# Altium PCB AMU_v2_w4.PcbDoc
Units mm, origin at the board's own origin, x right, y up, seen from the top; angles counter-clockwise.
Board outline 33 x 113 mm, 2 copper layers (Top Layer, Bottom Layer), stack 1.571 mm thick; 73 components, 85 nets, 229 pads, 101 vias.
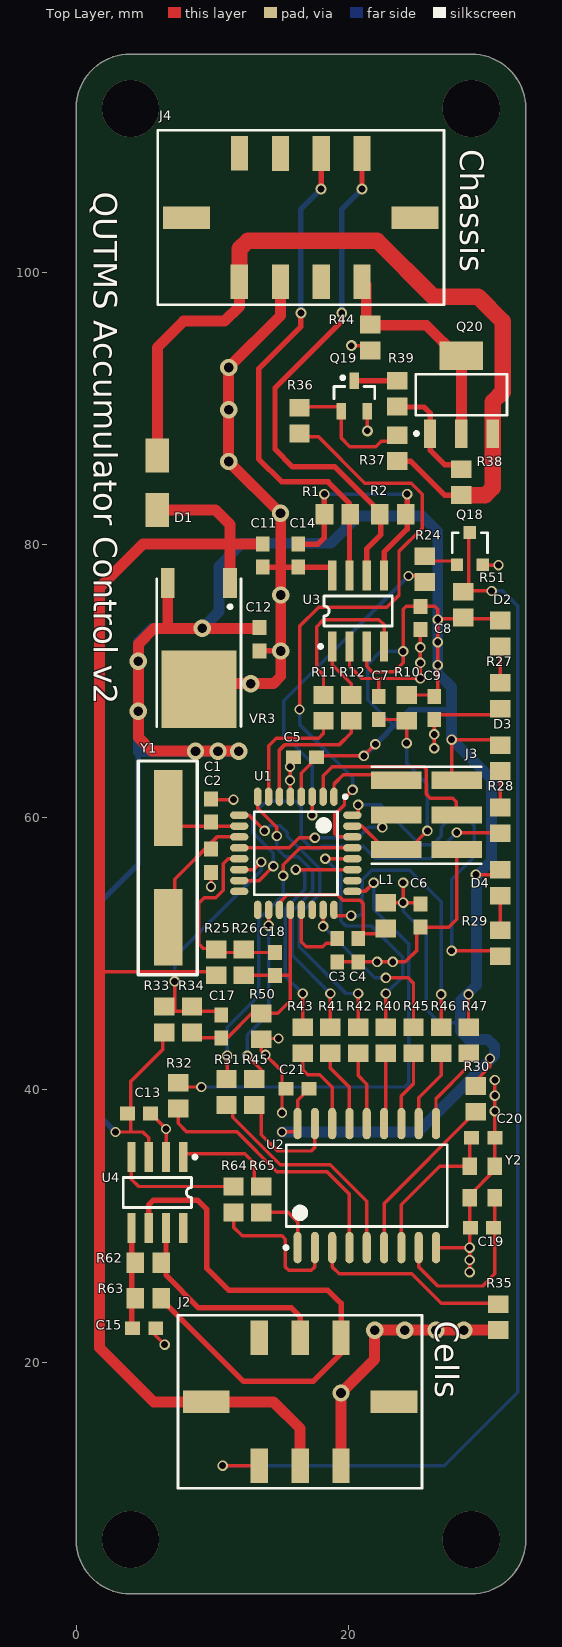
[diagram p0: Top Layer view]
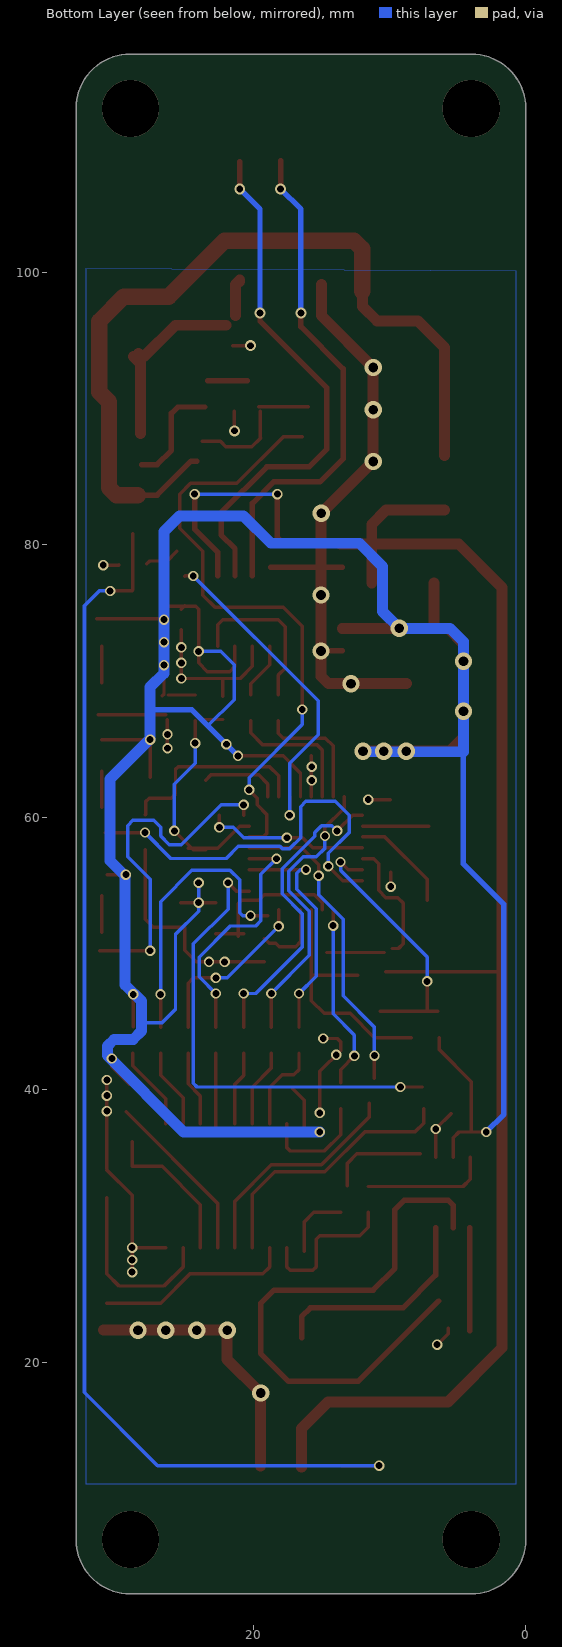
[diagram p1: Bottom Layer view, seen from below]

## Layer stack, top to bottom
Top Solder: solder mask 0.0102, Solder Resist, Dk 3.5
Top Layer: signal copper 0.0356
Dielectric1: core 1.5, FR-4, Dk 4.8
Bottom Layer: signal copper 0.0356
Bottom Solder: solder mask 0.0102, Solder Resist, Dk 3.5

## Board outline
0,7 0,112 cw(c4,112) 4,116 29,116 cw(c29,112) 33,112 33,7 cw(c29,7) 29,3 4,3 cw(c4,7)

## Design rules (kind name [scope] priority, off if disabled: settings)
Clearance [All] p1: gap=0.18
FabricationTestPointUsage TestPointUsage [All] p1: valid=0 allowmultiple=FALSE
FabricationTestpoint Testpoint [All] p1: side=3 testpointundercomponent=TRUE minsize=1.016 maxsize=2.54 preferedsize=1.524 minholesize=0 maxholesize=1.016 preferedholesize=0.813 testpointgrid=0.025 allowsidetop=TRUE allowsidebottom=TRUE usegrid=TRUE gridtolerance=0
HoleSize [All] p1: absolutevalues=TRUE maxlimit=10 minlimit=0.025 maxpercent=80.000 minpercent=20.000
PolygonConnect [All] p1: connectstyle=Relief reliefconductorwidth=0.254 reliefentries=4 polygonreliefangle="90 Angle" airgapwidth=0.254
RoutingVias [All] p1: holewidth=0.711 width=1.27 viastyle="Through Hole" minholewidth=0.2 minwidth=0.5 maxholewidth=10 maxwidth=10
SolderMaskExpansion SolderMaskExpansion_1 [(IsVia)] p1: expansion=-1
SolderMaskExpansion [All] p2: expansion=0.106
Width [All] p1: maxlimit=10 minlimit=0.2 preferedwidth=0.254 minimp=50.000000 maximp=50.000000 favimp=50.000000
27 further rules are at their usual default settings.

## Components (designator, comment, footprint, x,y, rotation, side; value= is the part's Value field where it differs from the comment)
C1 "Comment" J1-0603 9.906,60.485 r90 top
C2 "Comment" J1-0603 9.906,56.802 r90 top
C3 "Comment" J1-0603 19.177,50.237 r90 top
C4 "Comment" J1-0603 20.701,50.237 r90 top
C5 "Comment" J1-0603 16.8,64.4 r180 top
C6 "Comment" J1-0603 25.273,52.777 r90 top
C7 "Comment" J1-0603 22.225,68.017 r90 top
C8 "Comment" J1-0603 25.273,74.621 r90 top
C9 "Comment" J1-0603 26.289,68.017 r90 top
C11 "Comment" J1-0603 13.7,79.2 r270 top
C12 "Comment" J1-0603 13.462,73.058 r270 top
C13 "Comment" J1-0603 4.619,38.258 r180 top
C14 "Comment" J1-0603 16.3,79.2 r270 top
C15 "Comment" J1-0603 5,22.5 r180 top
C17 "Comment" J1-0603 10.668,44.649 r90 top
C18 "Comment" J1-0603 14.605,49.221 r90 top
C19 "Comment" J1-0603 29.784,29.876 r180 top
C20 "Comment" J1-0603 29.884,36.476 r180 top
C21 "Comment" J1-0603 16.256,40.077 r180 top
D1 "Comment" 2012[0805]#1 5.969,85.797 r270 top
D2 "Comment" 2012[0805]#2 31.115,73.478 r270 top
D3 "Comment" 2012[0805]#2 31.115,64.334 r270 top
D4 "Comment" 2012[0805]#2 31.115,55.19 r270 top
J2 "43045-0618" SO8#1 14.6,15.2 r0 top locked
J3 "15-91-3060" SOT23-6 25.273,60.397 r270 top
J4 "Header 4X2" MOLEX_8 16.5,104 r0 top
L1 "Comment" 2012[0805]#2 22.733,52.777 r270 top
Q18 "Comment" SOT23A 28.9,79.7 r0 top
Q19 "2N7002" SOT23_SAE 20.425,90.9 r0 top (schematic designator Q3)
Q20 "MOSFET_P_SAE" SOT-223 28.275,91 r0 top (schematic designator Q4)
R1 "Comment" 2012[0805]#2 19.177,82.241 r180 top
R2 "Comment" 2012[0805]#2 23.241,82.241 r180 top
R10 "Comment" 2012[0805]#2 24.257,68.017 r270 top
R11 "Comment" 2012[0805]#2 18.161,68.017 r270 top
R12 "Comment" 2012[0805]#2 20.193,68.017 r270 top
R24 "Comment" 2012[0805]#2 25.6,78.2 r270 top
R25 "Comment" 2012[0805]#2 10.287,49.348 r270 top
R26 "Comment" 2012[0805]#2 12.319,49.348 r270 top
R27 "Comment" 2012[0805]#2 31.115,68.906 r270 top
R28 "Comment" 2012[0805]#2 31.115,59.762 r270 top
R29 "Comment" 2012[0805]#2 31.115,50.745 r270 top
R30 "Comment" 2012[0805]#2 29.328,39.328 r270 top
R31 "Comment" 2012[0805]#2 11.04,39.836 r270 top
R32 "Comment" 2012[0805]#2 7.493,39.569 r270 top
R33 "Comment" 2012[0805]#2 6.477,45.157 r270 top
R34 "Comment" 2012[0805]#2 8.509,45.157 r270 top
R35 "Comment" 2012[0805]#2 30.988,23.313 r270 top
R36 "Comment" 2012[0805]#2 16.4,89.1 r90 top
R37 "Comment" 2012[0805]#2 23.573,87.085 r270 top
R38 "Comment" 2012[0805]#2 28.273,84.585 r270 top
R39 "Comment" 2012[0805]#2 23.573,91.085 r270 top
R40 "Comment" 2012[0805]#2 22.733,43.633 r270 top
R41 "Comment" 2012[0805]#2 18.669,43.633 r270 top
R42 "Comment" 2012[0805]#2 20.701,43.633 r270 top
R43 "Comment" 2012[0805]#2 16.637,43.633 r270 top
R44 "Comment" 2012[0805]#2 21.6,95.2 r270 top
R45 "Comment" 2012[0805]#2 13.072,39.836 r270 top
R45 "Comment" 2012[0805]#2 24.765,43.633 r270 top
R46 "Comment" 2012[0805]#2 26.797,43.633 r270 top
R47 "Comment" 2012[0805]#2 28.829,43.633 r270 top
R50 "Comment" 2012[0805]#2 13.589,44.649 r270 top
R51 "Comment" 2012[0805]#2 28.4,75.6 r270 top
R62 "Comment" 2012[0805]#2 5.3,27.3 r0 top
R63 "Comment" 2012[0805]#2 5.3,24.7 r180 top
R64 "Comment" 2012[0805]#2 11.557,31.949 r270 top
R65 "Comment" 2012[0805]#2 13.589,31.949 r270 top
U1 "INJ2" 32A_L 16.129,57.349 r270 top locked
U2 "MCP2515" SOL-18_N 21.336,32.965 r90 top locked
U3 "CAN xcvr" SO8#2 20.701,75.129 r0 top
U4 "CAN xcvr" SO8#2 5.969,32.457 r180 top
VR3 "" 369A-13 9.017,73.097 r180 top
Y1 "Comment" 2012[0805]#3 6.746,59.724 r270 top
Y2 "Comment" SOT223 32.134,30.476 r180 top

## Footprints (in the part's own frame and the unit in brackets; to place one, negate y for a bottom-side part, rotate by r counter-clockwise, add the part's x,y. Pads: shape width x height; smd on the part's side, far side on the other; paste and mask are expansions set on the pad)
32A_L [mm] "Thin QFP, 32-Leads, Body 7x7mm, Pitch 0.8mm, IPC High Density"
  oval 1.35x0.55 smd: 1(-4.15,2.8) 2(-4.15,2) 3(-4.15,1.2) 4(-4.15,0.4) 5(-4.15,-0.4) 6(-4.15,-1.2) 7(-4.15,-2) 8(-4.15,-2.8) 17(4.15,-2.8) 18(4.15,-2) 19(4.15,-1.2) 20(4.15,-0.4) 21(4.15,0.4) 22(4.15,1.2) 23(4.15,2) 24(4.15,2.8)
  oval 0.55x1.35 smd: 9(-2.8,-4.15) 10(-2,-4.15) 11(-1.2,-4.15) 12(-0.4,-4.15) 13(0.4,-4.15) 14(1.2,-4.15) 15(2,-4.15) 16(2.8,-4.15) 25(2.8,4.15) 26(2,4.15) 27(1.2,4.15) 28(0.4,4.15) 29(-0.4,4.15) 30(-1.2,4.15) 31(-2,4.15) 32(-2.8,4.15)
  silkscreen extent -4.27,-3.05 3.05,3.75, body extent -3.5,-3.5 3.5,3.5, height 1.2
369A-13 [mm] "TO, Flat Index; 3 In-Line, Axial Leads; Body Dia. 4.6mm; Lead Dia. 0.5 mm (max)"
  rect 1x2.2 smd: 1(-2.285,-4.1) 3(2.285,-4.1)
  rect 5.5x5.7 smd: 4(0,3.7)
  silkscreen extent -3.09,-4.4 3.08,6.45
2012[0805]#1 [mm] "Chip Resistor; Body 2.0 x 1.3 mm (LxW typ)"
  rect 2.5x1.7 smd: 1(-0.74,-0.004) 2(3.26,-0.004)
2012[0805]#2 [mm] "Chip Resistor; Body 2.0 x 1.3 mm (LxW typ)"
  rect 1.3x1.5 smd: 1(-0.95,0) 2(0.95,0)
2012[0805]#3 [mm] "Crystal, Thru-Hole; 2 Leads; Body 3.1 x 8.2 mm (Dia.xH)"
  rect 5.6x2.1 smd: 1(-0.95,0.025) 2(7.8,0.025)
J1-0603 [mm] "Chip Capacitor; Body 1.0 x 0.5 mm (LxW typ)"
  rect 1.1x1 smd: 1(-0.85,0) 2(0.85,0)
MOLEX_8 [mm] "SOP, 8-Leads, Body 5.3x5.3mm, Pitch 1.27mm, IPC High Density"
  rect 1.27x2.54 smd: 1(4.485,-4.7) 2(1.485,-4.7) 3(-1.5,-4.7) 4(-4.515,-4.7) 5(4.485,4.7) 6(1.485,4.7) 7(-1.5,4.7) 8(-4.502,4.708)
  rect 3.43x1.65 smd: ""(-8.4,0) ""(8.37,0)
  silkscreen extent -10.5,-6.4 10.5,6.4, body extent -9.82,-5.61 9.82,5.59, height 9.95
SO8#1 [mm] "SOP, 8-Leads, Body 5.3x5.3mm, Pitch 1.27mm, IPC High Density"
  rect 1.27x2.54 smd: 1(4.844,-2.804) 2(1.844,-2.804) 3(-1.156,-2.804) 4(4.844,6.596) 5(1.844,6.596) 6(-1.156,6.596)
  rect 3.43x1.65 smd: ""(-5.041,1.896) ""(8.729,1.896)
  silkscreen extent -7.11,-4.44 10.79,8.25
SO8#2 [mm] "SOP, 8-Leads, Body 5.3x5.3mm, Pitch 1.27mm, IPC High Density"
  rect 0.6x2.2 smd: 1(-1.905,-2.6) 2(-0.635,-2.6) 3(0.635,-2.6) 4(1.905,-2.6) 5(1.905,2.6) 6(0.635,2.6) 7(-0.635,2.6) 8(-1.905,2.6)
  silkscreen extent -2.88,-2.72 2.5,1.1
SOL-18_N [mm] "SOIC, 18-Leads, Body 11.6x7.5mm, Pitch 1.27mm, IPC Medium Density"
  oval 2.3x0.6 smd: 1(-4.55,5.08) 2(-4.55,3.81) 3(-4.55,2.54) 4(-4.55,1.27) 5(-4.55,0) 6(-4.55,-1.27) 7(-4.55,-2.54) 8(-4.55,-3.81) 9(-4.55,-5.08) 10(4.55,-5.08) 11(4.55,-3.81) 12(4.55,-2.54) 13(4.55,-1.27) 14(4.55,0) 15(4.55,1.27) 16(4.55,2.54) 17(4.55,3.81) 18(4.55,5.08)
  silkscreen extent -4.67,-5.9 3,6.05, body extent -3.8,-5.95 3.8,5.95, height 2.65
SOT23-6 [mm] "SOT-23/SC-74A; 5 Leads; Body 3.1 x 3 mm, inc. leads (LxW max)"
  rect 1.27x3.68 smd: 1(-2.308,-1.78) 2(-2.308,2.66) 3(0.232,-1.78) 4(0.232,2.66) 5(2.772,-1.78) 6(2.772,2.66)
  silkscreen extent -3.3,-3.56 3.81,4.45
SOT23_SAE [mm]
  rect 0.7x1.2 smd: 1(-0.95,-1.125) 2(0.95,-1.125) 3(0,1.125)
  silkscreen extent -1.5,-0.2 1.5,1.47, body extent -1.5,-1.13 1.5,1.13, height 1.21
SOT23A [mm] "SOT-23; 3 Leads; Body 3.0 x 2.5 mm, inc. leads (LxW max)"
  rect 0.9x0.95 smd: 1(-0.95,-1.175) 2(0.95,-1.175) 3(0,1.175)
  silkscreen extent -1.3,-0.3 1.3,1.18
SOT223 [mm] "SOT-223/SC-73; 4 Leads; Body 6.7 x 7.3 mm, inc. leads (LxW max)"
  rect 1.05x1.3 smd: 1(3.25,-3.9) 2(3.25,-1.6) 3(1.4,-1.6) 4(1.4,-3.9)
SOT-223 [mm]
  rect 0.9x2.1 smd: 1(-2.3,-2.85) 2(0,-2.85) 3(2.3,-2.85)
  rect 3.2x2.1 smd: 2(0,2.85)
  silkscreen extent -3.42,-2.97 3.35,1.5, body extent -3.25,-3.56 3.25,3.51, height 1.6

## Part data
J2 U3 U4: library part "SW DIP-4"
J4: "Header, 4-Pin, Dual row"
Q19: library part 2N7002_SAE
U1: library part ATtiny28L-4AI
Y1: library part "Res Semi"

## Via types
v1: diameter 0.762, hole 0.508, Top Layer to Bottom Layer, 73 vias
v2: diameter 1.27, hole 0.711, Top Layer to Bottom Layer, 18 vias
v3: diameter 0.8, hole 0.5, Top Layer to Bottom Layer, 6 vias
v4: diameter 4.2, hole 4.2, Top Layer to Bottom Layer, 4 vias

## Nets (pads, with @x,y where several pads share a name; then routed paths per layer and width w, separated by ;. In a path a pad name is that pad's centre, name@x,y a point inside that pad or via, vN(x,y) a via of type N, cw(c..) or ccw(c..) an arc to the next point about the centre after c; other vN are vias at no path point)
5V: C5.1 C6.2 C8.2 C9.2 C12.1 C13.2 C21.1 D2.1 D3.1 D4.1 J3.2 L1.1 R10.1 R30.1 R33.2 R47.1 R51.2 U1.4 U2.18 U3.3 U4.3 VR3.3 | length 256.5
  Top Layer w0.254: v1(2.9,36.9) 4,36.9 ; U4.3 5.334,36.466 4.9,36.9 4,36.9 ; R33.2@6.35,43.826 6.35,42.95 4,40.6 4,38.2 4,36.9 ; v1(15.113,36.902) 16.002,36.902 16.256,37.156 16.256,39.227 C21.1 ; U1.4 16.529,63.229 17.8,64.5 21.121,64.5 v1(21.971,65.35) ; U3.3 21.336,71.065 21.717,70.684 23.368,70.684 24.003,71.319 24.003,75.256 24.218,75.471 26.328,75.471 26.543,75.256 26.543,69.033 C9.2@26.67,68.906 ; L1.1 C6.2@25.334,53.727 ; v1(24.003,53.727) v1(24.003,55.19) ; R10.1 C9.2@26.223,68.967 ; C8.2@25.019,75.51 C8.2@25.273,75.256 ; v1@26.543,74.555 D2.1@31.496,74.555 ; J3.2@27.559,62.937 v1(27.559,65.692) D3.1@31.115,65.692 ; R47.1@28.8,44.612 v1(28.8,47) ; R30.1@29.1,40.4 30.373,41.673 v1(30.373,42.29) ; v1(29.337,55.786) D4.1@30.695,55.786
  Top Layer w0.8: 6.732,73.859 VR3.3 ; v2(11.938,64.842) 5.588,64.842 4.572,65.858 4.572,72.716 5.715,73.859 C12.1@13.462,73.859
  Bottom Layer w0.254: 23.321,66.7 21.4,68.621 21.4,71.2 22.369,72.169 v1(24.003,72.169) ; v1(24.003,55.19) 24.003,53.097 25.7,51.4 25.7,45.9 26.7,44.9 28.2,44.9
  Bottom Layer w0.4: v1(2.9,36.9) 1.6,38.2 1.6,53.6 4.572,56.572 4.572,64.8 ; v1(21.118,64.497) 24.521,67.9 27.559,67.9
  Bottom Layer w0.8: v2@11.98,64.8 4.572,64.8 4.572,72.872 5.559,73.859 9.259,73.859 10.5,75.1 10.5,78.4 12.2,80.1 18.7,80.1 20.7,82.1 25.4,82.1 26.543,80.957 26.543,70.557 27.559,69.541 27.559,65.741 30.5,62.8 30.5,56.8 29.4,55.7 29.4,47.7 28.2,46.5 28.2,44.3 28.8,43.7 30.2,43.7 30.7,43.2 30.7,42.5 25.102,36.902 v1(15.113,36.902)
  other v1: 26.543,71.153 26.543,72.843 26.543,74.494
  other v2: 8.763,64.842 10.414,64.842 4.572,67.763 4.572,71.446 9.271,73.859
5V_split: C17.2 R33.1 R34.1 U1.14 | length 19.7
  Top Layer w0.254: R33.1@6.438,45.753 C17.2@10.668,45.753 ; 7.239,45.753 v1(7.239,47.951) ; U1.14 13.024,56.149 v1(13.589,56.714)
  Bottom Layer w0.254: v1(7.239,47.951) 7.239,49.739 13.589,56.089 v1(13.589,56.714)
AGND: C17.1 C18.1 R26.2 R34.2 R50.1 U1.20 | length 18.5
  Top Layer w0.254: R34.2@8.382,43.826 11.115,43.826 12.888,45.599 14.793,45.599 15.729,46.535 U1.20 ; R26.2 15.729,48.398
Alarm_Gate: Q20.1 R38.1 R39.2 | length 8
  Top Layer w0.4: R39.2@23.55,90.1 25.525,90.1 26,89.625 26,86.925 27.05,85.875 R38.1@28.175,85.875
Alarm_N_Drain: Q19.3 R39.1 | length 2.9
  Top Layer w0.4: Q19.3 R39.1@23.325,92.025
Alarm_N_Gate: Q19.1 R36.2 R37.1 | length 10.3
  Top Layer w0.254: R36.2@15.95,90.125 Q19.1@19.6,90.125 ; 19.45,87.825 20.1,87.175 22,87.175 22.4,87.575 R37.1@23.725,87.575 ; 19.475,87.85 Q19.1
AMS_alarm: J4.1 Q20.2 R44.1 | length 17.4
  Top Layer w0.8: J4.1 20.985,99.415 21.3,99.1 21.3,96.8 ; R44.1@22,96.1 25.7,96.1 28,93.8 28.775,93.8 28.425,93.45 Q20.2@28.425,94.025 ; Q20.2@28.275,88.15 Q20.2@28.275,93.85
Aref: C3.2 U1.21 | length 5.4
  Top Layer w0.254: U1.21 16.529,50.853 16.891,50.491 18.095,50.491 18.349,50.745 18.835,50.745 C3.2
AVCC: C4.2 L1.2 U1.19 | length 11.6
  Top Layer w0.254: U1.19 14.929,53.729 15.5,54.3 19.178,54.3 19.558,53.92 20.828,53.92 21.082,53.666 C4.2@21.082,51.253 ; C4.2@20.701,51.446 L1.2@22.733,51.446
BattSenseSplit: 
BattSNSgnd: 
BattSNSpwr: 
BattSNSshdn: 
BattSNSsig: 
CAN2_HI: J4.6 R1.1 U3.7 | length 37.1
  Top Layer w0.4: v3(16.5,97) 16.5,96 13.4,92.9 13.4,86.3 15.1,84.6 18.5,84.6 20.066,83.034 U3.7 ; v3(17.985,106.1) J4.6@17.985,108.185
  Bottom Layer w0.4: v3(16.5,97) 16.5,104.615 v3(17.985,106.1)
CAN2_LO: J4.5 R2.2 U3.6 | length 38.4
  Top Layer w0.4: v3(19.5,97) 19.5,96.4 14.6,91.5 14.6,87 15.9,85.7 19,85.7 22.352,82.348 22.352,80.717 21.336,79.701 U3.6 ; v3(20.985,106.1) J4.5@20.985,108.085
  Bottom Layer w0.4: v3(19.5,97) 19.5,104.615 v3(20.985,106.1)
CAN_XT1: C19.1 U2.8 Y2.3 | length 13.5
  Top Layer w0.254: U2.8 25.146,26.996 26.543,25.599 29.845,25.599 30.734,26.488 Y2.3
CAN_XT2: C20.2 U2.7 Y2.1 | length 11.1
  Top Layer w0.254: U2.7 23.876,31.568 26.684,34.376 Y2.1 C20.2@28.884,36.195
CANB_HI: J2.5 R62.2 U4.7 | length 16.1
  Top Layer w0.4: U4.7 6.604,26.396 9,24 15.8,24 16.444,23.356 J2.5
CANB_LO: J2.4 R63.1 U4.6 | length 41.6
  Top Layer w0.4: U4.6 5.334,31.534 5.7,31.9 8.9,31.9 9.6,31.2 9.6,26.9 11.2,25.3 18.47,25.3 19.449,24.321 19.449,20.649 17.4,18.6 12.3,18.6 R63.1@6.4,24.5
CLKOUT: R35.1 U2.3 | length 14.5
  Top Layer w0.254: U2.3 18.796,26.996 19.304,26.488 24.638,26.488 26.797,24.329 R35.1@30.734,24.329
CS: 
CS_CAN: R43.2 U2.16 | length 6.6
  Top Layer w0.254: R43.2 16.637,41.474 17.018,41.093 17.878,41.093 18.796,40.175 U2.16
currentSense: 
currentTemp: 
GLV_IN: D1.1 J4.4 Q20.3 R37.2 R38.2 | length 62.2
  Top Layer w0.4: R37.2@24.125,86.125 24.55,86.125 27.05,83.625 R38.2@28.3,83.625
  Top Layer w0.8: D1.1@5.965,86.549 5.965,94.465 7.9,96.4 10.9,96.4 11.985,97.485 J4.4
  Top Layer w1.2: J4.4@12,98.6 12,101.7 12.6,102.3 22.1,102.3 26.2,98.2 29.5,98.2 31.3,96.4 31.3,91.2 30.575,90.475 30.575,84.175 30.025,83.625 R38.2@28.475,83.625
GLV_OUT: C11.1 D1.2 J2.2 J2.@9.559,17.096 R25.2 VR3.1 | length 107.6
  Top Layer w0.254: 1.73,48.652 R25.2@10.287,48.652
  Top Layer w0.8: D1.2 10.245,82.537 11.302,81.48 VR3.1 ; C11.1@13.589,80.043 4.914,80.043 1.73,76.859 1.73,21.07 5.7,17.1 14.5,17.1 16.449,15.151 J2.2@16.449,12.3
GLV_split: C18.2 R25.1 R26.1 U1.13 | length 13.6
  Top Layer w0.254: R25.1@9.779,50.364 9.336,50.364 9,50.7 9,53.7 9.4,54.1 10.26,54.1 10.795,54.635 10.795,56.587 11.157,56.949 U1.13 ; R25.1@10.375,50.071 C18.2
GND: C1.2 C2.1 C3.1 C4.1 C5.2 C6.1 C7.2 C8.1 C9.1 C11.2 C12.2 C13.1 C14.2 C15.1 C19.2 C20.1 C21.2 J2.1 J3.6 J4.3 Q18.2 Q19.2 R27.2 R35.2 R44.2 R50.2 U1.5 U2.9 U3.2 U3.8 U4.2 VR3.4 Y2.2 Y2.4 | length 139.6
  Top Layer w0.254: C13.1 v1(6.604,37.123) U4.2 ; C15.1@5.7,22.5 5.7,22.1 v1(6.5,21.3) ; v1(9.906,54.9) C2.1 ; C1.2@9.955,61.286 v1(11.557,61.286) ; v1(14.859,43.76) 13.843,43.76 13.589,43.506 13.589,42.871 15.113,41.347 v1(15.113,38.299) ; U1.5 C5.2@15.729,64.5 ; C3.1 24.169,49.387 25.019,50.237 25.019,51.927 27.344,51.927 27.933,52.516 J3.6 ; U3.2 20.066,71.065 20.955,70.176 v1(25.273,70.176) C8.1 ; v3(20.2,94.6) R44.2@21.5,94.6 ; v3(21.375,88.35) Q19.2 ; C7.2 22.225,70.176 ; v1@26.289,64.842 C9.1 ; U2.9 v1(28.884,28.415) ; C9.1@26.416,67.509 R27.2@31.369,67.509 ; v1(28.884,26.615) 28.884,32.258 Y2.4@30.734,34.108 ; Q18.2@29.845,78.525 29.87,78.5 v1(31,78.5) ; Y2.4@30.734,34.235 v1(30.734,40.712)
  Top Layer w0.4: C12.2 v2@14.859,72.208 ; C11.2@13.462,78.343 U3.8@18.7,78.343
  Top Layer w0.8: VR3.4@8.763,69.795 14.478,69.795 15.025,70.342 15.025,82.275 v2(11.2,86.1) v2(11.2,93) 15,96.8 J4.3@15,99.1 ; J2.1@19.449,12.396 v2(19.449,17.749) 21.91,20.21 v2(21.91,22.363) R35.2
  other v1: 28.884,27.504 30.734,38.426 30.734,39.569 13.903,42.557 22.098,49.387 23.241,49.387 15.7,62.7 15.7,63.7 26.289,65.057 26.289,66.073 25.273,71.319 25.273,72.462
  other v2: 24.13,22.363 26.416,22.363 28.448,22.363 12.827,69.795 15.025,72.2 15.025,76.3 15,82.3 11.2,89.9
GND1: 
INT_CAN: R45.2@24.765,42.683 U2.12 | length 5.5
  Top Layer w0.254: U2.12 23.876,39.54 24.765,40.429 R45.2@24.765,42.683
LED_green: D2.2 R27.1 | length 2.7
  Top Layer w0.254: R27.1 D2.2
LED_red: D4.2 R29.1 | length 2.7
  Top Layer w0.254: R29.1@31.115,51.568 D4.2
LED_yellow: D3.2 R28.1 | length 2.7
  Top Layer w0.254: R28.1 D3.2
MISO: R41.1 U1.8 | length 20.9
  Top Layer w0.254: U1.8 13.329,60.657 14.732,59.254 v1(14.732,58.619) ; R41.1 v1(18.669,47.062)
  Bottom Layer w0.254: v1(14.732,58.619) 14.732,57.73 15.367,57.095 16.315,57.095 17.385,56.025 17.385,54.603 15.875,53.093 15.875,49.856 v1(18.669,47.062)
MISO2: J3.1 U1.1 | length 5.9
  Top Layer w0.254: U1.1 18.929,62.435 19.594,63.1 23.098,63.1 J3.1
MISO_CAN: R41.2 U2.15 | length 5.7
  Top Layer w0.254: R41.2 18.669,41.593 20.066,40.196 U2.15
MOSI: R42.1 U1.9 | length 22.5
  Top Layer w0.254: U1.9 12.694,60.149 v1@13.779,59.063 ; R42.1 v1(20.701,47.062)
  Bottom Layer w0.254: v1(13.843,59) 14.224,59.381 14.986,59.381 15.494,58.873 15.494,58.606 17.881,56.219 17.881,54.38 16.383,52.883 16.383,50.491 19.812,47.062 v1(20.701,47.062)
MOSI2: J3.4 U1.2 | length 14.7
  Top Layer w0.254: U1.2 18.129,63.029 18.8,63.7 25.51,63.7 25.7,63.51 25.7,61.7 26,61.4 27.633,61.4 27.9,61.133 27.9,60.198 J3.4
MOSI_CAN: R42.2 U2.14 | length 5.4
  Top Layer w0.254: R42.2 20.701,41.046 21.336,40.411 U2.14
PB2: U1.16
PB3: R45.1@24.765,44.583 U1.23 | length 12.8
  Top Layer w0.254: v1(18.129,51.983) U1.23 ; v1(22.733,48.205) 24.384,48.205 24.765,47.824 R45.1@24.765,44.583
  Bottom Layer w0.254: v1(18.129,51.983) 21.907,48.205 v1(22.733,48.205)
PB4: R46.1 U1.24 | length 20.8
  Top Layer w0.254: U1.24@18.923,52.777 v1(20.193,52.777) ; R46.1 v1(26.797,46.997)
  Bottom Layer w0.254: v1(20.193,52.777) 20.777,52.777 21,53 21,55.4 21.7,56.1 24.5,56.1 26.797,53.803 v1(26.797,46.997)
PB5: U1.26
PB7: R43.1 U1.27 | length 17.4
  Top Layer w0.254: v1(16.124,56.149) U1.27 ; R43.1 v1(16.637,47.062)
  Bottom Layer w0.254: v1(16.124,56.149) 16.551,56.149 16.8,55.9 16.8,54.7 15.367,53.267 15.367,48.332 v1(16.637,47.062)
PC0: R36.1 U1.30 | length 45.8
  Top Layer w0.254: v1(16.4,67.9) 16.4,74 17.8,75.4 22.8,75.4 23.7,76.3 23.7,79.5 25.4,81.2 25.4,83.7 24.6,84.5 21.2,84.5 17.8,87.9 R36.1@16.4,87.9 ; U1.30 19.251,58.549 19,58.8 19,60.2 19.7,60.9 19.7,61.4 v1(20.3,62)
  Bottom Layer w0.254: v1(16.4,67.9) 16.4,66.8 20.3,62.9 v1(20.3,62)
PC1: R24.2 U1.3 | length 24.2
  Top Layer w0.254: v1(17.329,60.143) U1.3 ; v1(24.4,77.7) 24.988,77.7 R24.2@25.019,77.669
  Bottom Layer w0.254: v1(17.329,60.143) 17.329,63.971 15.24,66.06 15.24,68.54 v1(24.4,77.7)
PC2: R12.2 U1.6 | length 10.1
  Top Layer w0.254: U1.6 14.929,64.929 15.3,65.3 19.3,65.3 20.193,66.193 R12.2
PC3: R11.2 U1.7 | length 9.1
  Top Layer w0.254: U1.7 14.129,65.229 14.7,65.8 17.8,65.8 18.161,66.161 R11.2
PC4: U1.17
PC5: R45.1@13.072,40.786 U1.18 | length 13.7
  Top Layer w0.254: v1(12.573,42.49) 13.589,41.474 R45.1@13.589,40.519 ; v1(14.129,52.047) U1.18
  Bottom Layer w0.254: v1(12.573,42.49) 12.573,44.014 14.129,45.57 v1(14.129,52.047)
PC6: U1.22
PC7: R32.1 U1.25 | length 34.5
  Top Layer w0.254: R32.1@7.6,40.2 v1(9.2,40.2) ; U1.25 21.203,54.549 v1(21.844,55.19)
  Bottom Layer w0.254: v1(9.2,40.2) 24.126,40.2 24.4,40.474 24.4,50.7 21.844,53.256 v1(21.844,55.19)
PD0: R31.1 U1.29 | length 22.9
  Top Layer w0.254: R31.1@11.1,40.846 v1(11.1,42.5) ; v1(15.2,55.7) 15.2,56.5 16.449,57.749 U1.29
  Bottom Layer w0.254: v1(11.1,42.5) 11.1,44.6 13.4,46.9 13.4,52.5 15.2,54.3 v1(15.2,55.7)
PD1: R29.2 U1.32 | length 25.3
  Top Layer w0.254: U1.32@20.701,60.143 v1(20.701,60.905) ; v1(27.559,50.198) R29.2@31.242,50.198
  Bottom Layer w0.254: v1(20.701,60.905) 22.352,60.905 25.273,57.984 26.162,57.984 26.797,58.619 26.797,59.254 27.305,59.762 28.829,59.762 29.21,59.381 29.21,57.095 27.559,55.444 v1(27.559,50.198)
PD7: R28.2 U1.15 | length 29.6
  Top Layer w0.254: U1.15 13.427,55.349 v1(14.478,56.4) ; v1(27.94,58.873) R28.2@30.861,58.873
  Bottom Layer w0.254: v1(14.478,56.4) 14.478,57.349 12.954,58.873 12.954,60.143 13.97,61.159 16.129,61.159 16.51,60.778 16.51,58.5 17.31,57.7 17.877,57.7 18.034,57.857 21.082,57.857 21.971,56.968 26.035,56.968 v1(27.94,58.873)
RESET: C7.1 J3.5 R10.2 U1.31 | length 18.3
  Top Layer w0.254: U1.31 20.987,59.349 22.606,57.73 J3.5@24.765,57.73 ; C7.1 R10.2@23.837,67.167 ; J3.5 24.406,57.625 v1(25.781,59) ; v1(24.257,65.438) R10.2
  Bottom Layer w0.254: v1(24.257,65.438) 24.257,63.953 25.781,62.429 v1(25.781,59)
RST_CAN: R45.2@13.072,38.886 U2.17 | length 8.2
  Top Layer w0.254: R45.2@13.589,38.619 13.589,36.711 14.795,35.505 17.272,35.505 17.526,35.759 U2.17
RX0BUF: R46.2 U2.11 | length 5.9
  Top Layer w0.254: U2.11 25.146,39.405 26.797,41.056 R46.2
RX1BUF: R47.2 U2.10 | length 6.2
  Top Layer w0.254: U2.10 26.416,39.344 28.829,41.757 R47.2
RX2: R64.1 U4.4 | length 9.3
  Top Layer w0.254: U4.4 4.064,33.436 4.601,32.899 R64.1
RXCAN: R11.1 U3.4 | length 12.1
  Top Layer w0.254: R11.1 18.161,70.43 17.653,70.938 17.653,73.986 18.161,74.494 22.225,74.494 22.606,74.113 U3.4
RXCAN2: R64.2 U2.2 | length 11.1
  Top Layer w0.254: R64.2 11.557,29.917 12.192,29.282 15.113,29.282 15.367,29.028 15.367,26.996 15.621,26.742 17.272,26.742 17.526,26.996 U2.2
SCK: R40.1 U1.28 | length 18.3
  Top Layer w0.254: v1(18.288,56.949) U1.28 ; R40.1 v1(22.733,47.062)
  Bottom Layer w0.254: v1(18.288,56.949) 19.431,55.806 19.431,52.396 19.812,52.015 21.685,52.015 23.966,49.734 23.966,48.295 v1(22.733,47.062)
SCK2: J3.3 U1.12 | length 12
  Top Layer w0.254: U1.12 15.64,57.749 16.383,58.492 v1(17.526,58.492) ; v1@22.479,59.311 J3.3@22.479,60.143
  Bottom Layer w0.254: v1(17.526,58.492) 20.701,58.492 21.463,59.254 v1(22.479,59.254)
SCK_CAN: R40.2 U2.13 | length 5.5
  Top Layer w0.254: U2.13@22.733,37.156 R40.2
SHDN: 
SHDN_link: 
SPLIT_CAN2: C14.1 R1.2 R2.1 U3.5 | length 18.2
  Top Layer w0.4: C14.1@16.129,80.043 17.741,80.043 18.227,80.529 v1(18.227,83.7) ; U3.5 22.606,79.447 24.3,81.141 v1(24.3,83.7)
  Bottom Layer w0.254: v1(18.227,83.7) v1(24.3,83.7)
SPLIT_CANB: C15.2 R62.1 R63.2 U4.5 | length 7.6
  Top Layer w0.4: C15.2@4.095,22.3 U4.5@4.095,29.857
STB_CAN2: 
STB_CANB: U4.8
TX0_RTS: R32.2 U2.4 | length 19.7
  Top Layer w0.254: R32.2 7.493,37.537 8.096,36.934 11.787,36.934 14.74,33.981 18.415,33.981 20.066,32.33 U2.4
TX1_RTS: R31.2 U2.5 | length 16.8
  Top Layer w0.254: R31.2@11.5,39 11.5,37.975 14.986,34.489 18.669,34.489 21.336,31.822 U2.5
TX2: R65.1 U4.1 | length 7.3
  Top Layer w0.254: U4.1@7.747,35.311 12.386,35.311 13.081,34.616 R65.1@13.081,32.965
TX2RTS: R30.2 U2.6 | length 12.7
  Top Layer w0.254: U2.6 22.606,31.656 R30.2
TXCAN: R12.1 U3.1 | length 4.1
  Top Layer w0.254: U3.1 18.796,71.192 20.193,69.795 R12.1
TXCAN2: R65.2 U2.1 | length 5.1
  Top Layer w0.254: R65.2 15.555,30.999 16.256,30.298 U2.1@16.256,28.139
Vdd1: 
Vin: 
Vout2: 
WAKE_GATE: Q18.1 R24.1 | length 2.6
  Top Layer w0.254: R24.1@25.6,79.5 26.3,78.8 27.6,78.8 Q18.1@27.8,78.6
WAKE_OUT: J2.3 Q18.3 R51.1 | length 92.5
  Top Layer w0.254: v1(10.758,12.421) J2.3@13.549,12.421 ; Q18.3@28.829,80.8 28.829,76.671 28.9,76.6 v1(30.5,76.6)
  Bottom Layer w0.254: v1(10.758,12.421) 27.021,12.421 32.4,17.8 32.4,75.5 31.3,76.6 v1(30.5,76.6)
XTAL1: C1.1 U1.10 Y1.1 | length 4.9
  Top Layer w0.254: Y1.1@7.112,59.349 U1.10
XTAL2: C2.2 U1.11 Y1.2 | length 7.6
  Top Layer w0.254: Y1.2@7.239,53.92 7.239,55.444 10.344,58.549 U1.11
pads on no net: J2.6 J2.@23.329,17.096 J4. J4.2 J4.7 J4.8
copper on no net:
  other v4: 4,7 29,7 4,112 28.998,112

## Polygon pours and split planes (outlines as drawn)
GND on Bottom Layer "Top Layer-No Net" (solid, shelved, pour order 4): 32.3,11.1 0.7,11.1 0.7,91.5 0.7,100.051 32.3,100.251

## Silkscreen, mask and mechanical layers (free items; w line width, h text height)
Top Overlay:
  lines w0.254: 4.572,48.424 4.572,64.124 8.89,64.124 8.89,48.424 4.572,48.424
  text "Chassis" at 27.6,109 h3 r270
  text "QUTMS Accumulator Control v2" at 0.7,105.9 h3 r270
  text "Cells" at 25.781,23.059 h3 r270
Mechanical 1:
  the board outline again, w0.254